# EAGLE board SimpleTimerPCB (EAGLE 6.5.0)
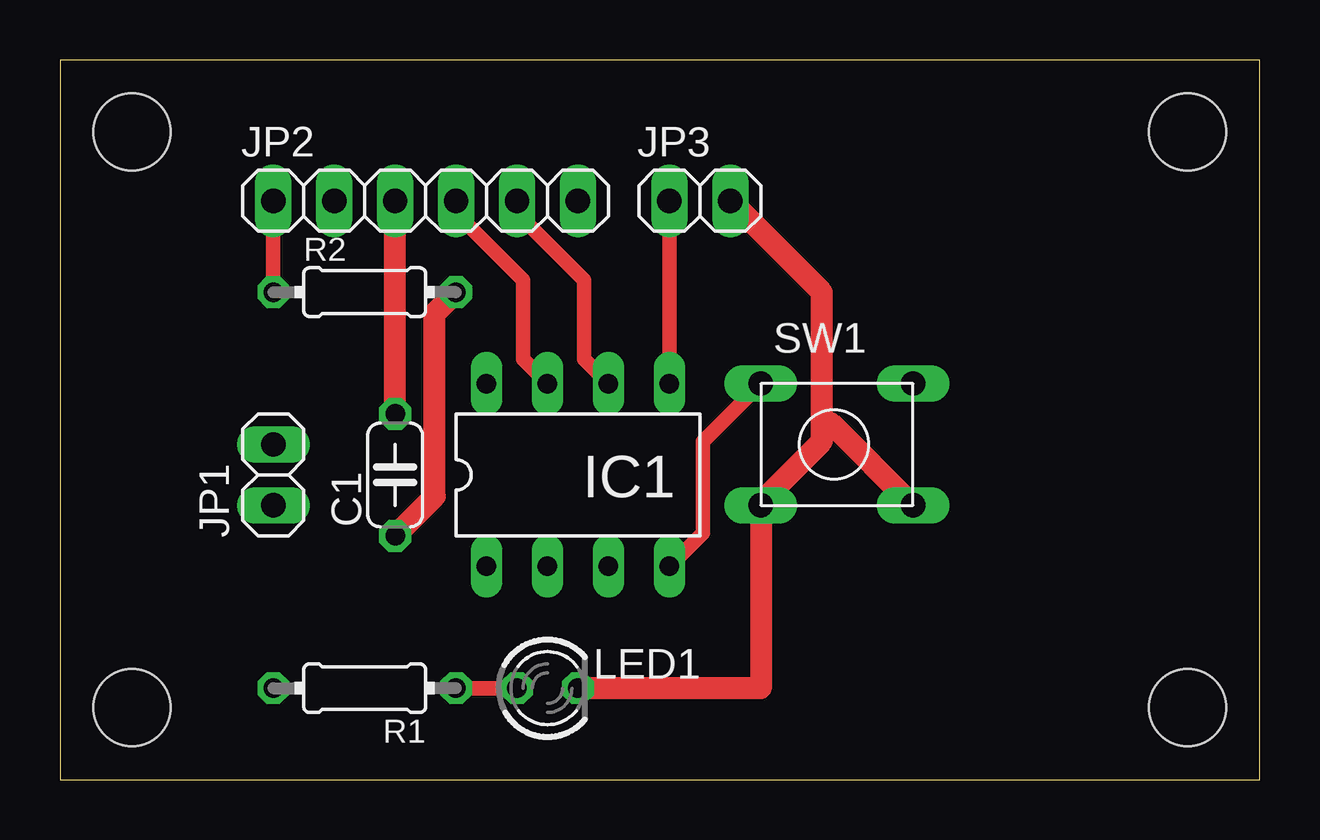
[diagram p0: board, top side]
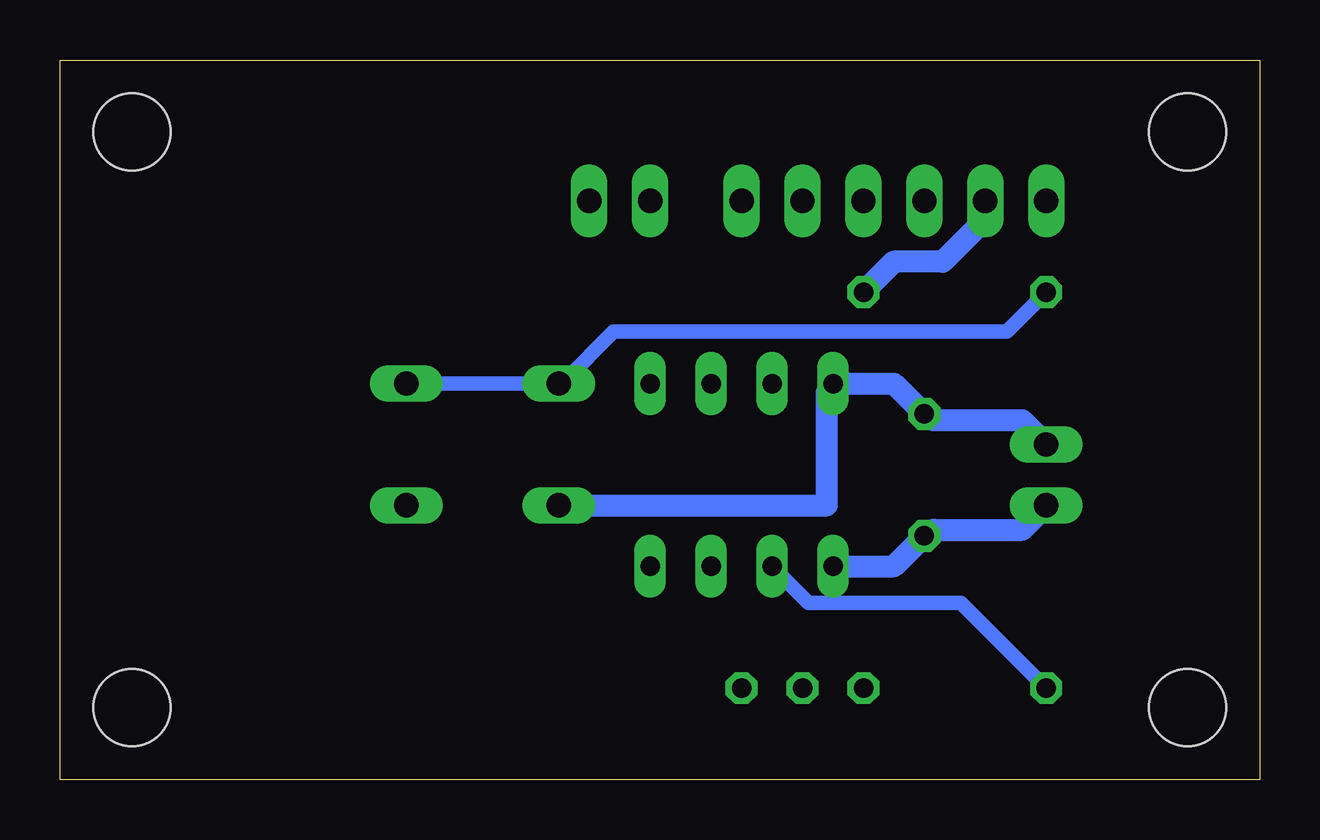
[diagram p1: board, bottom side, seen from below]

Size 50 x 30 mm. Coordinates in mm from the lower left corner, seen from the top.
Outline: 0,0 50,0 50,30 0,30 0,0
Copper layers (1*16): Top 0.035mm / dielectric 1.5mm / Bottom 0.035mm
Design rules "Elecrow_2-layer_eagle_rule": minimum track width 6mil, minimum drill 12mil, track to track 6mil, track to pad 6mil, pad to pad 6mil, via to via 6mil, smd to smd 0mil, copper to edge 10mil, drill to drill 10mil, minimum pad ring 10mil, minimum via ring 6mil, stop-mask expansion 2mil, vias tented up to drill 100mil, thermal gap 10mil
Net classes: 0 default: width 0.61 mm, clearance 0.508 mm; 1 Power: width 0.914 mm, clearance 0.508 mm
Holes 3.2 mm at 3,27 3,3 47,3 47,27

## Footprints (pad centres in the part's own frame; a part is rotated, then mirrored left to right if it is on the bottom)
C050-024X044 = drill 0.813 octagon: 1 -2.54,0; 2 2.54,0
DIL8 = drill 0.813 long: 1 -3.81,-3.81; 2 -1.27,-3.81; 3 1.27,-3.81; 4 3.81,-3.81; 5 3.81,3.81; 6 1.27,3.81; 7 -1.27,3.81; 8 -3.81,3.81
1X02 = drill 1.016 long: 1 -1.27,0; 2 1.27,0
1X06 = drill 1.016 long: 1 -6.35,0; 2 -3.81,0; 3 -1.27,0; 4 1.27,0; 5 3.81,0; 6 6.35,0
LED3MM = drill 0.813 octagon: A -1.27,0; K 1.27,0
0204/7 = drill 0.813 octagon: 1 -3.81,0; 2 3.81,0
TACTSW-25X20 = drill 1.016 long: 1 -2.54,2.54; 2 3.81,2.54; 3 -2.54,-2.54; 4 3.81,-2.54

## Placement (x,y rotation side)
C1  0.1u  [C050-024X044]  13.97,12.7 90 top
IC1  PIC12F683P  [DIL8]  21.59,12.7 0 top
JP1  [1X02]  8.89,12.7 90 top
JP2  [1X06]  15.24,24.13 0 top
JP3  [1X02]  26.67,24.13 0 top
LED1  [LED3MM]  20.32,3.81 0 top
R1  330  [0204/7]  12.7,3.81 180 top
R2  10k  [0204/7]  12.7,20.32 0 top
SW1  [TACTSW-25X20]  31.75,13.97 0 top

## Library data of the parts
C1 R1 R2 = rcl
IC1 = MyParts; MF: MICROCHIP; MPN: PIC12F683-I/P; OC_FARNELL: 9759034; OC_NEWARK: 89H0442
JP1 JP3 = pinhead
JP2 = MyParts
LED1 = led
SW1 = MyParts; AKIZUKI-OC: P-03651

## Nets
GND [Power]: C1.2 IC1.8 JP1.2 JP2.3 JP3.2 LED1.K SW1.3 SW1.4
N$1: LED1.A R1.1
N$2: IC1.4 JP2.1 R2.1 SW1.1 SW1.2
N$4: IC1.2 R1.2
N$6: IC1.5 JP3.1
PIN4: IC1.7 JP2.4
PIN5: IC1.6 JP2.5
VDD [Power]: C1.1 IC1.1 JP1.1 JP2.2 R2.2

## Tracks (layer width: path | path; a pad name or v marks a point on that pad's centre or on a via)
GND
  Top 0.914: C1.2 JP2.3 | LED1.K 29.21,3.81 SW1.3 29.46,11.81 31.75,14.1 31.75,14.86 | JP3.2 31.75,20.32 31.75,14.86 | SW1.4 32.13,14.86 31.75,14.86
  Bottom 0.914: JP1.2 9.91,14.99 13.59,14.99 C1.2 15.24,16.51 IC1.8 18.03,16.13 18.03,11.43 SW1.3
N$1
  Top 0.61: LED1.A R1.1
N$2
  Top 0.61: JP2.1 R2.1 | IC1.4 26.8,10.29 26.8,14.1 SW1.1
  Bottom 0.61: SW1.2 SW1.1 28.96,16.64 26.92,18.67 10.54,18.67 R2.1
N$4
  Bottom 0.61: R1.2 12.45,7.37 18.8,7.37 IC1.2
N$6
  Top 0.61: JP3.1 IC1.5
PIN4
  Top 0.61: IC1.7 19.3,17.53 19.3,20.83 16.51,23.62 JP2.4
PIN5
  Top 0.61: IC1.6 21.84,17.53 21.84,20.83 19.05,23.62 JP2.5
VDD
  Top 0.914: R2.2 15.62,19.43 15.62,11.81 C1.1
  Bottom 0.914: R2.2 15.24,21.59 13.21,21.59 11.43,23.37 JP2.2 | IC1.1 15.24,8.89 C1.1 13.59,10.41 9.91,10.41 JP1.1